# EAGLE board All_Board (EAGLE 9.5.1)
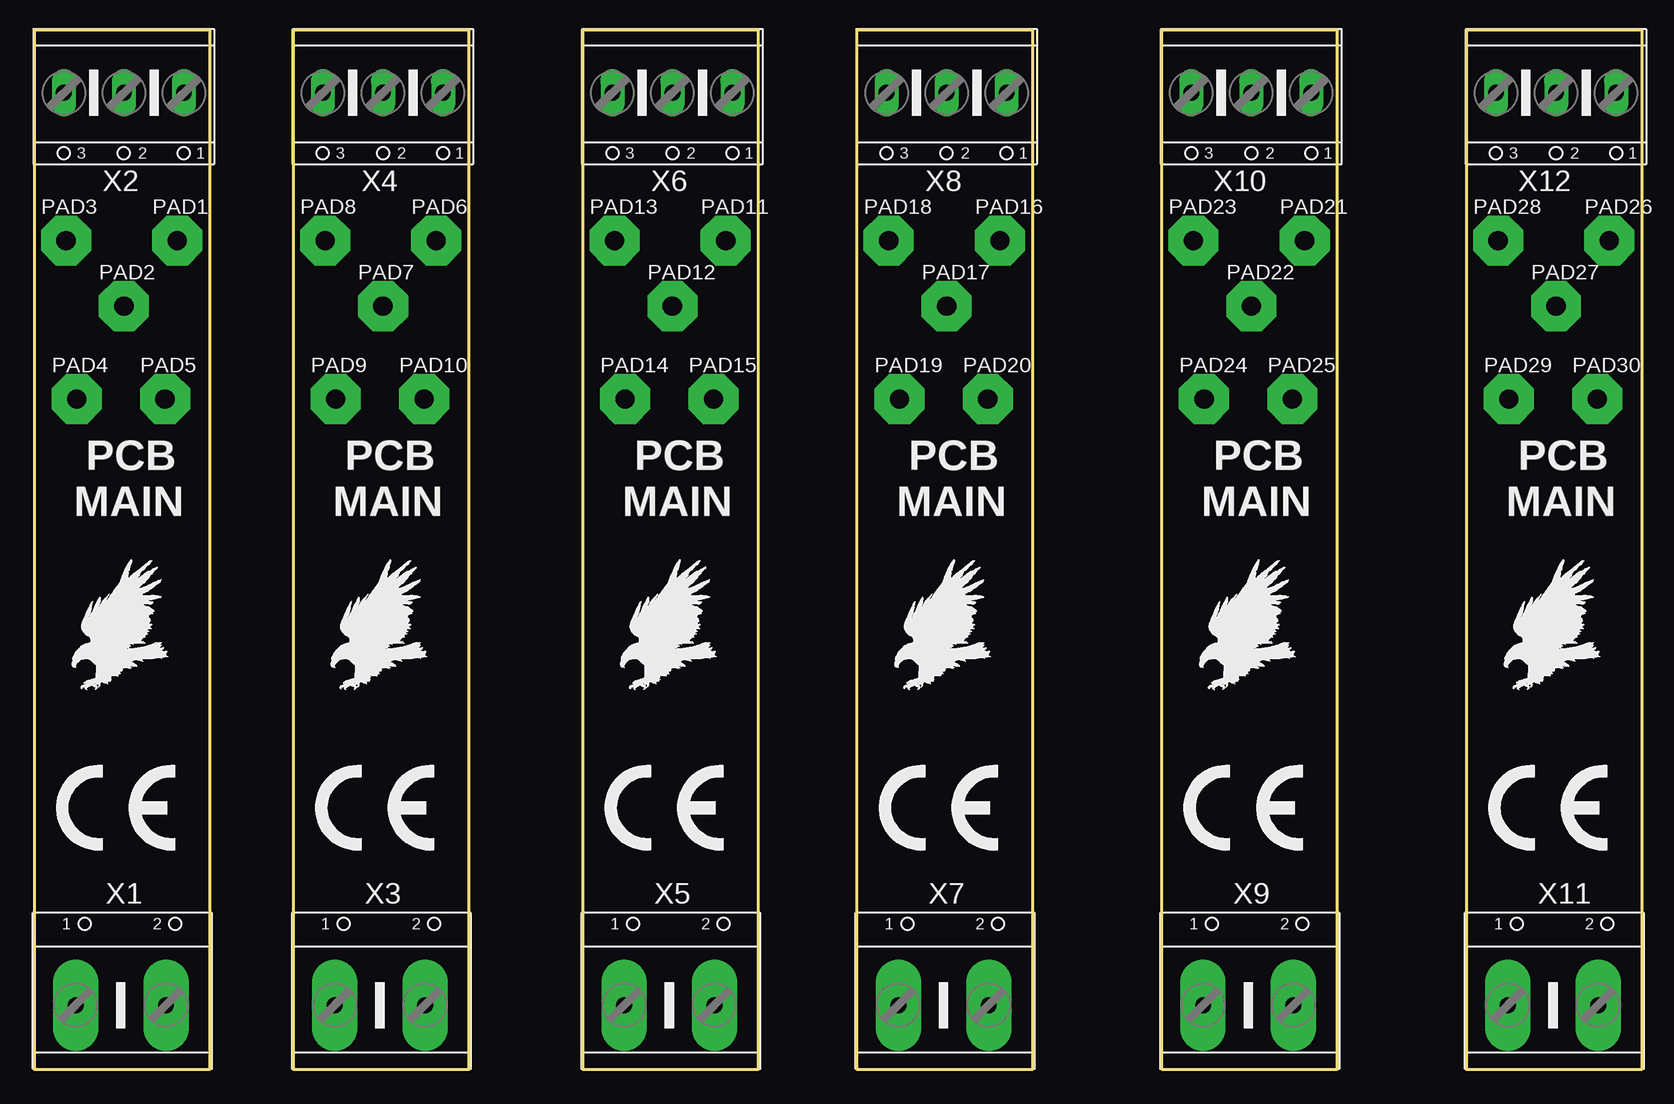
[diagram p0: board, top side]
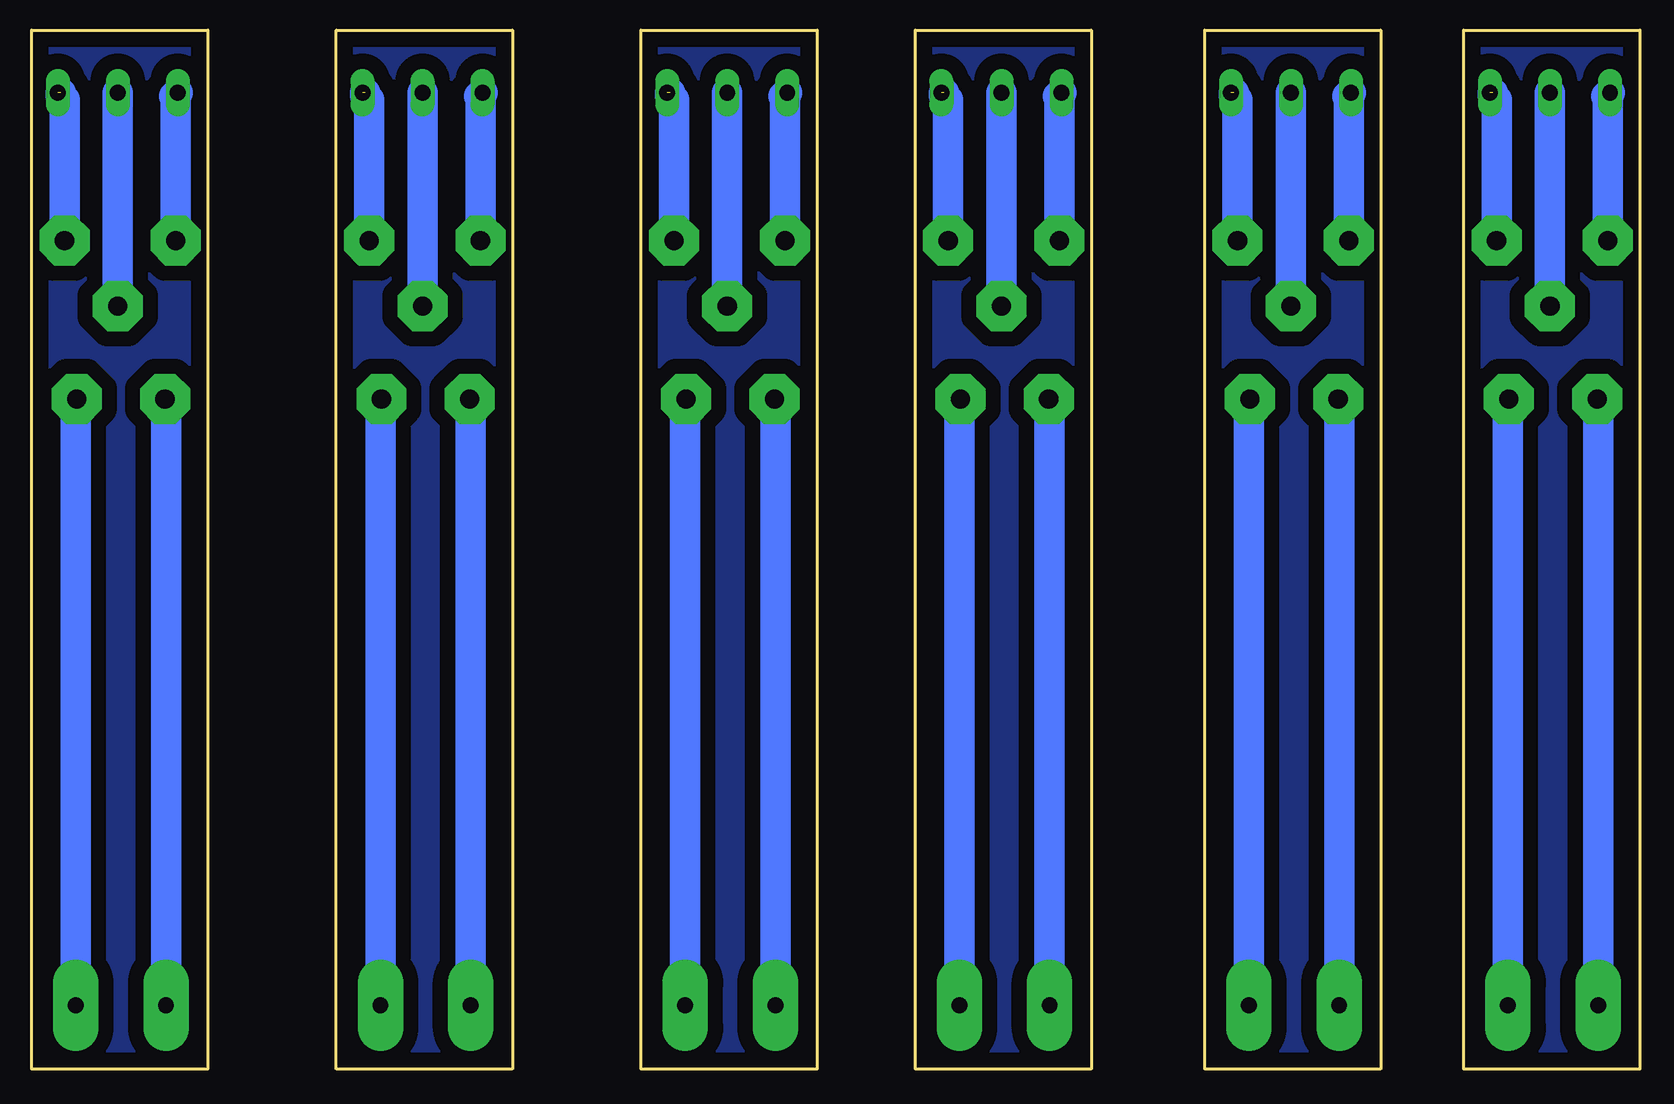
[diagram p1: board, bottom side, seen from below]

Size 134.06 x 86.64 mm. Coordinates in mm from the lower left corner, seen from the top.
Outline: 0,86.64 0,0 14.68,0 14.68,86.64 0,86.64
Outline: 21.59,86.64 21.59,0 36.27,0 36.27,86.64 21.59,86.64
Outline: 45.72,86.64 45.72,0 60.4,0 60.4,86.64 45.72,86.64
Outline: 68.58,86.64 68.58,0 83.26,0 83.26,86.64 68.58,86.64
Outline: 93.98,86.64 93.98,0 108.66,0 108.66,86.64 93.98,86.64
Outline: 119.38,86.64 119.38,0 134.06,0 134.06,86.64 119.38,86.64
Copper layers (1*16): Top 0.035mm / dielectric 1.5mm / Bottom 0.035mm
Design rules "default": minimum track width 6mil, minimum drill 0.35mm, track to track 6mil, track to pad 6mil, pad to pad 6mil, via to via 6mil, smd to smd 6mil, copper to edge 40mil, drill to drill 6mil, minimum pad ring 10mil, minimum via ring 8mil, stop-mask expansion 4mil, vias tented up to drill 0mil, thermal gap 10mil

## Footprints (pad centres in the part's own frame; a part is rotated, then mirrored left to right if it is on the bottom)
4,16O1,6 = drill 1.6 pad 4.166 octagon: 1 0,0
GMKDSP_3/2 = drill 1.321 pad 3.81 long: 1 -3.765,0; 2 3.765,0
MKDS_3/3 = drill 1.321 long: 1 -5.004,0; 2 0,0; 3 5.004,0

## Placement (x,y rotation side)
PAD1  WIREPAD4,16O1,6  [4,16O1,6]  11.94,69.09 0 top
PAD2  WIREPAD4,16O1,6  [4,16O1,6]  7.49,63.63 0 top
PAD3  WIREPAD4,16O1,6  [4,16O1,6]  2.67,69.09 0 top
PAD4  WIREPAD4,16O1,6  [4,16O1,6]  3.56,55.88 0 top
PAD5  WIREPAD4,16O1,6  [4,16O1,6]  10.92,55.88 0 top
PAD6  WIREPAD4,16O1,6  [4,16O1,6]  33.53,69.09 0 top
PAD7  WIREPAD4,16O1,6  [4,16O1,6]  29.08,63.63 0 top
PAD8  WIREPAD4,16O1,6  [4,16O1,6]  24.26,69.09 0 top
PAD9  WIREPAD4,16O1,6  [4,16O1,6]  25.15,55.88 0 top
PAD10  WIREPAD4,16O1,6  [4,16O1,6]  32.51,55.88 0 top
PAD11  WIREPAD4,16O1,6  [4,16O1,6]  57.66,69.09 0 top
PAD12  WIREPAD4,16O1,6  [4,16O1,6]  53.21,63.63 0 top
PAD13  WIREPAD4,16O1,6  [4,16O1,6]  48.39,69.09 0 top
PAD14  WIREPAD4,16O1,6  [4,16O1,6]  49.28,55.88 0 top
PAD15  WIREPAD4,16O1,6  [4,16O1,6]  56.64,55.88 0 top
PAD16  WIREPAD4,16O1,6  [4,16O1,6]  80.52,69.09 0 top
PAD17  WIREPAD4,16O1,6  [4,16O1,6]  76.07,63.63 0 top
PAD18  WIREPAD4,16O1,6  [4,16O1,6]  71.25,69.09 0 top
PAD19  WIREPAD4,16O1,6  [4,16O1,6]  72.14,55.88 0 top
PAD20  WIREPAD4,16O1,6  [4,16O1,6]  79.5,55.88 0 top
PAD21  WIREPAD4,16O1,6  [4,16O1,6]  105.92,69.09 0 top
PAD22  WIREPAD4,16O1,6  [4,16O1,6]  101.47,63.63 0 top
PAD23  WIREPAD4,16O1,6  [4,16O1,6]  96.65,69.09 0 top
PAD24  WIREPAD4,16O1,6  [4,16O1,6]  97.54,55.88 0 top
PAD25  WIREPAD4,16O1,6  [4,16O1,6]  104.9,55.88 0 top
PAD26  WIREPAD4,16O1,6  [4,16O1,6]  131.32,69.09 0 top
PAD27  WIREPAD4,16O1,6  [4,16O1,6]  126.87,63.63 0 top
PAD28  WIREPAD4,16O1,6  [4,16O1,6]  122.05,69.09 0 top
PAD29  WIREPAD4,16O1,6  [4,16O1,6]  122.94,55.88 0 top
PAD30  WIREPAD4,16O1,6  [4,16O1,6]  130.3,55.88 0 top
U$1  [CE_7.3MM]  1.78,18.16 0 top
U$2  [EAGLE-PLC-8MM]  3.17,31.62 0 top
U$3  [CE_7.3MM]  23.37,18.16 0 top
U$4  [EAGLE-PLC-8MM]  24.77,31.62 0 top
U$5  [CE_7.3MM]  47.5,18.16 0 top
U$6  [EAGLE-PLC-8MM]  48.9,31.62 0 top
U$7  [CE_7.3MM]  70.36,18.16 0 top
U$8  [EAGLE-PLC-8MM]  71.75,31.62 0 top
U$9  [CE_7.3MM]  95.76,18.16 0 top
U$10  [EAGLE-PLC-8MM]  97.16,31.62 0 top
U$11  [CE_7.3MM]  121.16,18.16 0 top
U$12  [EAGLE-PLC-8MM]  122.56,31.62 0 top
X1  [GMKDSP_3/2]  7.24,5.33 0 top
X2  [MKDS_3/3]  7.49,81.41 180 top
X3  [GMKDSP_3/2]  28.83,5.33 0 top
X4  [MKDS_3/3]  29.08,81.41 180 top
X5  [GMKDSP_3/2]  52.96,5.33 0 top
X6  [MKDS_3/3]  53.21,81.41 180 top
X7  [GMKDSP_3/2]  75.82,5.33 0 top
X8  [MKDS_3/3]  76.07,81.41 180 top
X9  [GMKDSP_3/2]  101.22,5.33 0 top
X10  [MKDS_3/3]  101.47,81.41 180 top
X11  [GMKDSP_3/2]  126.62,5.33 0 top
X12  [MKDS_3/3]  126.87,81.41 180 top

## Library data of the parts
PAD1-PAD30 = wirepad
U$1-U$12 = logo
X1-X12 = con-ptr500; OC_FARNELL: unknown; OC_NEWARK: unknown

## Nets
N$1: PAD1.1 X2.1
N$2: PAD2.1 X2.2
N$3: PAD3.1 X2.3
N$4: PAD4.1 X1.1
N$5: PAD5.1 X1.2
N$7: PAD9.1 X3.1
N$8: PAD10.1 X3.2
N$9: PAD6.1 X4.1
N$10: PAD8.1 X4.3
N$11: PAD7.1 X4.2
N$13: PAD14.1 X5.1
N$14: PAD15.1 X5.2
N$15: PAD11.1 X6.1
N$16: PAD13.1 X6.3
N$17: PAD12.1 X6.2
N$19: PAD19.1 X7.1
N$20: PAD20.1 X7.2
N$21: PAD16.1 X8.1
N$22: PAD18.1 X8.3
N$23: PAD17.1 X8.2
N$25: PAD24.1 X9.1
N$26: PAD25.1 X9.2
N$27: PAD21.1 X10.1
N$28: PAD23.1 X10.3
N$29: PAD22.1 X10.2
N$31: PAD29.1 X11.1
N$32: PAD30.1 X11.2
N$33: PAD26.1 X12.1
N$34: PAD28.1 X12.3
N$35: PAD27.1 X12.2

## Tracks (layer width: path | path; a pad name or v marks a point on that pad's centre or on a via)
N$1  (1 unrouted)
  Bottom 2.54: PAD1.1 11.94,80.85 12.27,81.18 12.27,81.41
N$2
  Bottom 2.54: PAD2.1 X2.2
N$3
  Bottom 2.54: X2.3 2.79,81.1 2.67,80.97 PAD3.1
N$4
  Bottom 2.54: X1.1 3.47,55.8 PAD4.1
N$5
  Bottom 2.54: X1.2 11,55.8 PAD5.1
N$6
  pour Bottom (isolate 1.27): 14.68,0 0,0 0,86.64 14.68,86.64
N$7
  Bottom 2.54: X3.1 25.06,55.8 PAD9.1
N$8
  Bottom 2.54: X3.2 32.59,55.8 PAD10.1
N$9  (1 unrouted)
  Bottom 2.54: PAD6.1 33.53,80.85 33.86,81.18 33.86,81.41
N$10
  Bottom 2.54: X4.3 24.38,81.1 24.26,80.97 PAD8.1
N$11
  Bottom 2.54: PAD7.1 X4.2
N$12
  pour Bottom (isolate 1.27): 36.27,0 21.59,0 21.59,86.64 36.27,86.64
N$13
  Bottom 2.54: X5.1 49.19,55.8 PAD14.1
N$14
  Bottom 2.54: X5.2 56.72,55.8 PAD15.1
N$15  (1 unrouted)
  Bottom 2.54: PAD11.1 57.66,80.85 57.99,81.18 57.99,81.41
N$16
  Bottom 2.54: X6.3 48.51,81.1 48.39,80.97 PAD13.1
N$17
  Bottom 2.54: PAD12.1 X6.2
N$18
  pour Bottom (isolate 1.27): 60.4,0 45.72,0 45.72,86.64 60.4,86.64
N$19
  Bottom 2.54: X7.1 72.05,55.8 PAD19.1
N$20
  Bottom 2.54: X7.2 79.58,55.8 PAD20.1
N$21  (1 unrouted)
  Bottom 2.54: PAD16.1 80.52,80.85 80.85,81.18 80.85,81.41
N$22
  Bottom 2.54: X8.3 71.37,81.1 71.25,80.97 PAD18.1
N$23
  Bottom 2.54: PAD17.1 X8.2
N$24
  pour Bottom (isolate 1.27): 83.26,0 68.58,0 68.58,86.64 83.26,86.64
N$25
  Bottom 2.54: X9.1 97.45,55.8 PAD24.1
N$26
  Bottom 2.54: X9.2 104.98,55.8 PAD25.1
N$27  (1 unrouted)
  Bottom 2.54: PAD21.1 105.92,80.85 106.25,81.18 106.25,81.41
N$28
  Bottom 2.54: X10.3 96.77,81.1 96.65,80.97 PAD23.1
N$29
  Bottom 2.54: PAD22.1 X10.2
N$30
  pour Bottom (isolate 1.27): 108.66,0 93.98,0 93.98,86.64 108.66,86.64
N$31
  Bottom 2.54: X11.1 122.85,55.8 PAD29.1
N$32
  Bottom 2.54: X11.2 130.38,55.8 PAD30.1
N$33  (1 unrouted)
  Bottom 2.54: PAD26.1 131.32,80.85 131.65,81.18 131.65,81.41
N$34
  Bottom 2.54: X12.3 122.17,81.1 122.05,80.97 PAD28.1
N$35
  Bottom 2.54: PAD27.1 X12.2
N$36
  pour Bottom (isolate 1.27): 134.06,0 119.38,0 119.38,86.64 134.06,86.64

## Text on the board
tNames: PCB / MAIN | PCB / MAIN | PCB / MAIN | PCB / MAIN | PCB / MAIN | PCB / MAIN